# Allegro board test.brd
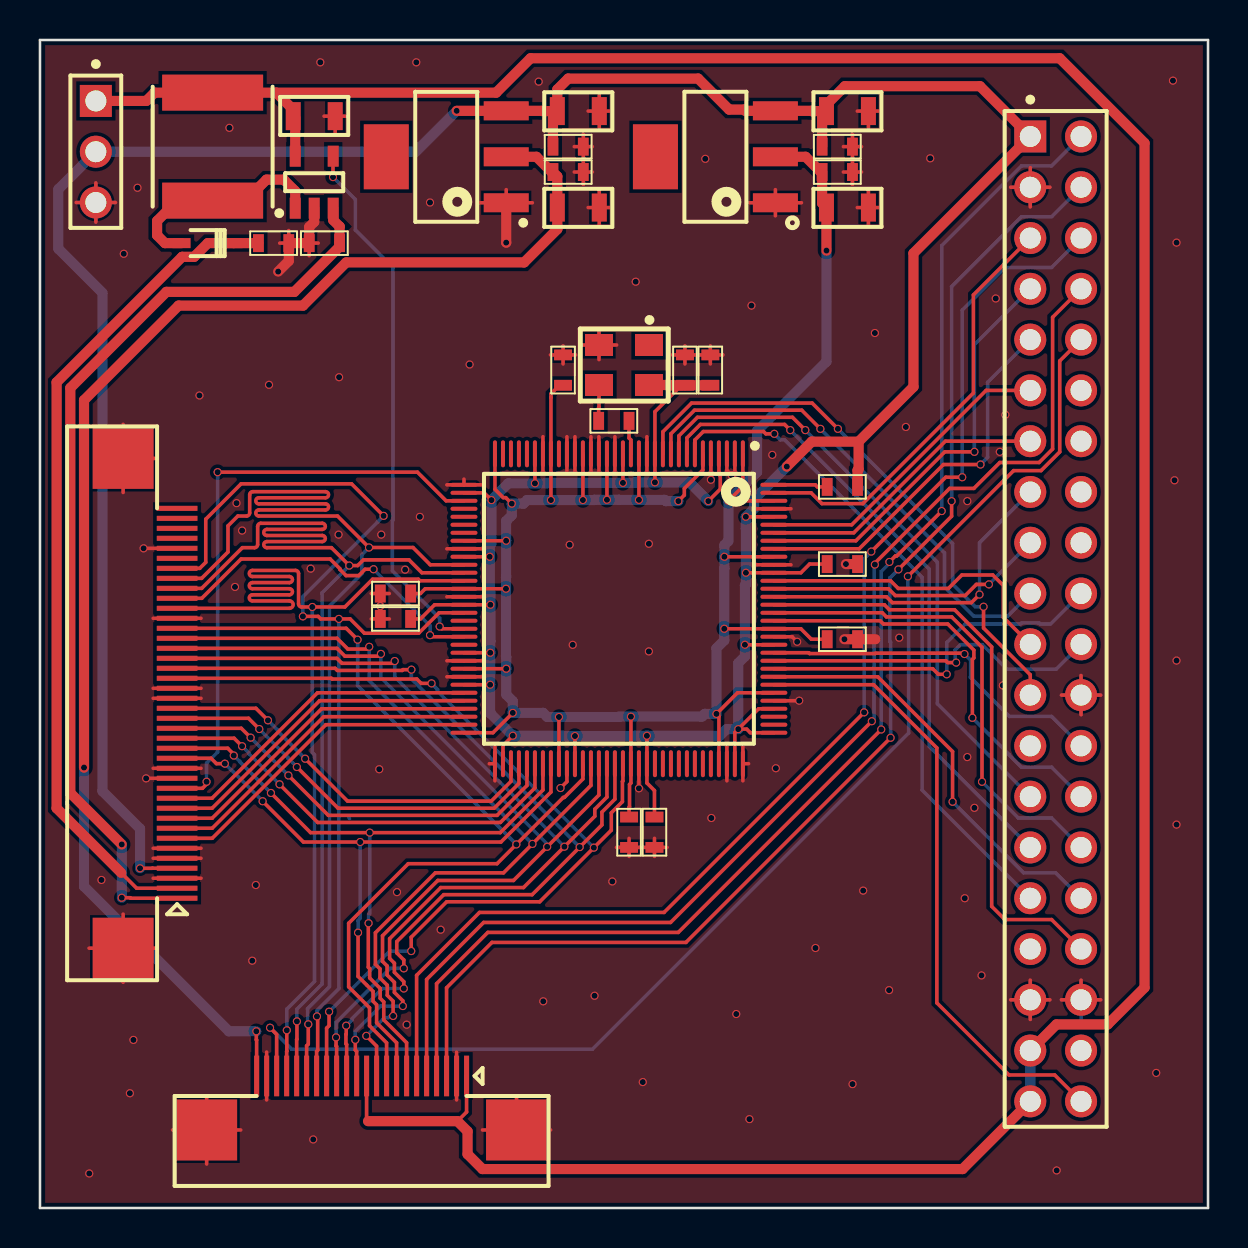
[diagram p0: board, top side]
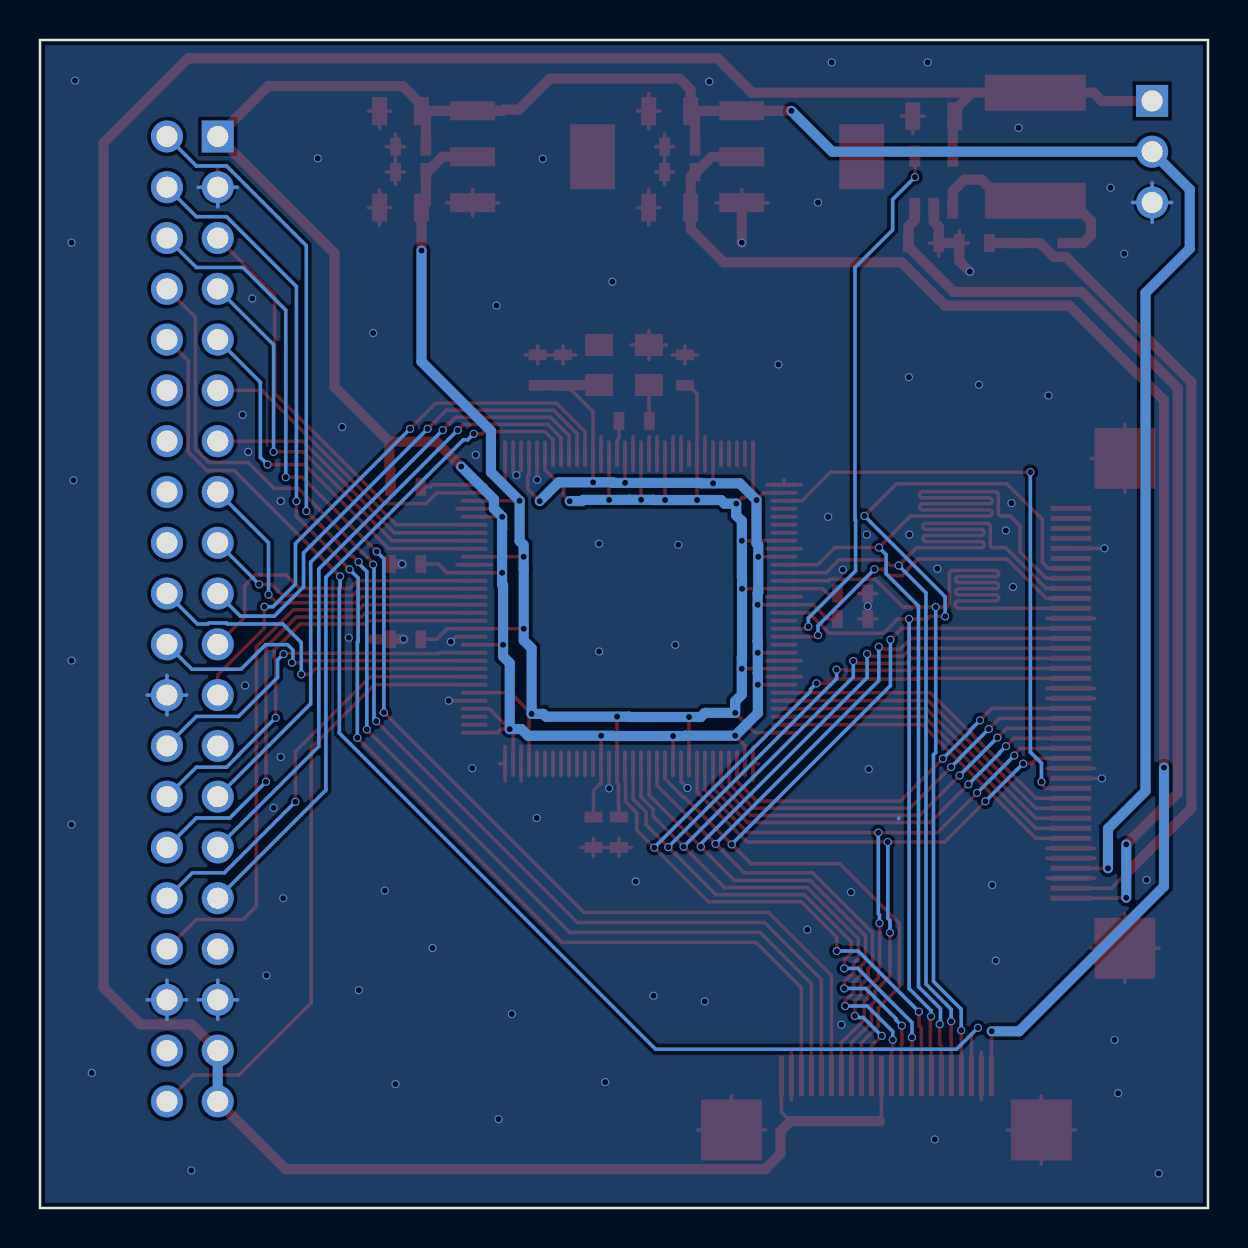
[diagram p1: board, bottom side, seen from below]

Outline 58.42 x 58.42 mm; copper layers: TOP, BOTTOM. Coordinates in mm from the lower left corner of the outline.
Outline path: 0,58.42 0,0 58.42,0 58.42,58.42 0,58.42

## Design rules (mm)
net group POWER: nets 1.2 2.5 3.3 5

## Placement (name value [footprint] x y rotation side)
C1  0.1uF  [0603]  33.53 41.91 90 top
C2  0.1uF  [0603]  26.16 41.91 90 top
C3  10uF  [0805]  26.92 54.86 180 top
C4  0.1uF  [0603]  26.42 53.09 180 top
C5  10uF  [0805]  26.92 50.04 180 top
C6  0.1uF  [0603]  26.42 51.82 180 top
C7  10uF  [0805]  40.39 50.04 180 top
C8  0.1uF  [0603]  39.88 51.82 180 top
C9  10uF  [0805]  40.39 54.86 180 top
C10  0.1uF  [0603]  39.88 53.09 180 top
C11  0.1uF  [0603]  17.78 29.46 180 top
C12  0.1uF  [0603]  17.78 30.73 180 top
C13  0.1uF  [0603]  32.26 41.91 270 top
C14  10uF  [0805]  13.72 54.61 0 top
C15  0.1uF  [0603]  11.68 48.26 0 top
C16  0.1uF  [0603]  40.13 32.21 0 top
C17  0.1uF  [0603]  40.13 28.45 0 top
C18  0.1uF  [0603]  30.73 18.8 270 top
C19  0.1uF  [0603]  29.46 18.8 270 top
D1  1n5819  [SOD323]  8.38 48.26 180 top
F1  -  [FPC-22]  21.34 6.6 180 top
F2  -  [FPC-40]  6.86 15.49 90 top
H1  Header20*2  [H-20-2]  49.53 53.59 270 top
J1  CON3  [H-3]  2.79 55.37 270 top
L1  10uH  [L-6-6-3]  8.64 53.09 90 top
O1  OSC  [OSC-3225]  29.21 42.16 270 top
R1  4.7K  [0603]  40.13 36.07 0 top
R2  33  [0603]  28.7 39.37 0 top
R3  10  [0603]  14.22 48.26 180 top
U1  AS1117-2.5  [AS1117-SOT223]  20.32 52.58 180 top
U2  AS1117-1.2  [AS1117-SOT223]  33.78 52.58 180 top
U3  SSD1963  [SSD1963-LQFP]  28.96 29.97 270 top
U4  CAT4238  [CAT4238-TSOT23]  13.72 51.31 90 top

## Library data of the parts
C1-C19 = CAP NP
D1 = 1n5819
F1 = FPC-22
F2 = FPC-40
H1 = Header20*2
J1 = CON3
L1 = INDUCTOR
O1 = OSC
R1-R3 = R
U1 U2 = AS1117
U3 = SSD1963
U4 = CAT4238

## Footprints (pads in the part's own frame, mm; a bottom-side part is the same pattern mirrored in y, then rotated)
0603
  rect 0.541x0.899 smd: 1(-0.759,0) 2(0.759,0)
0805
  rect 0.749x1.4 smd: 1(-1.049,0) 2(1.049,0)
AS1117-SOT223
  rect 2.25x0.95 smd: 1(-3,2.299) 2(-3,0) 3(-3,-2.299)
  rect 2.25x3.251 smd: 4(3,0)
CAT4238-TSOT23
  rect 1.049x0.551 smd: 1(-1.3,0.95) 2(-1.3,0) 3(-1.3,-0.95) 4(1.3,-0.95) 5(1.3,0.95)
FPC-22
  rect 0.254x2.032 smd: 1(0,0) 2(0.5,0) 3(1.001,0) 4(1.501,0) 5(1.999,0) 6(2.499,0) 7(3,0) 8(3.5,0) 9(4,0) 10(4.501,0) 11(5.001,0) 12(5.499,0) 13(5.999,0) 14(6.5,0) 15(7,0) 16(7.501,0) 17(8.001,0) 18(8.499,0) 19(8.999,0) 20(9.5,0) 21(10,0) 22(10.5,0)
  rect 3.048x3.048 smd: 23(-2.499,2.7) 24(13,2.7)
FPC-40
  rect 0.254x2.032 smd: 1(0,0) 2(0.5,0) 3(1.001,0) 4(1.501,0) 5(1.999,0) 6(2.499,0) 7(3,0) 8(3.5,0) 9(4,0) 10(4.501,0) 11(5.001,0) 12(5.499,0) 13(5.999,0) 14(6.5,0) 15(7,0) 16(7.501,0) 17(8.001,0) 18(8.499,0) 19(8.999,0) 20(9.5,0) 21(10,0) 22(10.5,0) 23(11.001,0) 24(11.501,0) 25(11.999,0) 26(12.499,0) 27(13,0) 28(13.5,0) 29(14,0) 30(14.501,0) 31(15.001,0) 32(15.499,0) 33(15.999,0) 34(16.5,0) 35(17,0) 36(17.501,0) 37(18.001,0) 38(18.499,0) 39(18.999,0) 40(19.5,0)
  rect 3.048x3.048 smd: 41(-2.499,2.7) 42(21.999,2.7)
H-3
  rect 1.6x1.6 hole 1.049: 1(0,0)
  round 1.6 hole 1.049: 2(2.54,0) 3(5.08,0)
H-20-2
  rect 1.6x1.6 hole 1.049: 1(0,0)
  round 1.6 hole 1.049: 2(0,2.54) 3(2.54,0) 4(2.54,2.54) 5(5.08,0) 6(5.08,2.54) 7(7.62,0) 8(7.62,2.54) 9(10.16,0) 10(10.16,2.54) 11(12.7,0) 12(12.7,2.54) 13(15.24,0) 14(15.24,2.54) 15(17.78,0) 16(17.78,2.54) 17(20.32,0) 18(20.32,2.54) 19(22.86,0) 20(22.86,2.54) 21(25.4,0) 22(25.4,2.54) 23(27.94,0) 24(27.94,2.54) 25(30.48,0) 26(30.48,2.54) 27(33.02,0) 28(33.02,2.54) 29(35.56,0) 30(35.56,2.54) 31(38.1,0) 32(38.1,2.54) 33(40.64,0) 34(40.64,2.54) 35(43.18,0) 36(43.18,2.54) 37(45.72,0) 38(45.72,2.54) 39(48.26,0) 40(48.26,2.54)
L-6-6-3
  rect 1.801x5.05 smd: 1(-2.7,0) 2(2.7,0)
OSC-3225
  rect 1.1x1.4 smd: 1(-1.001,1.25) 2(-1.001,-1.25) 3(1.001,-1.25) 4(1.001,1.25)
SOD323
  rect 0.899x0.5 smd: 1(-1.3,0) 2(1.3,0)
SSD1963-LQFP
  oval 1.349x0.201 smd: 1(-7.75,6.2) 2(-7.75,5.799) 3(-7.75,5.4) 4(-7.75,5.001) 5(-7.75,4.6) 6(-7.75,4.201) 7(-7.75,3.8) 8(-7.75,3.401) 9(-7.75,3) 10(-7.75,2.601) 11(-7.75,2.2) 12(-7.75,1.801) 13(-7.75,1.4) 14(-7.75,1.001) 15(-7.75,0.599) 16(-7.75,0.201) 17(-7.75,-0.201) 18(-7.75,-0.599) 19(-7.75,-1.001) 20(-7.75,-1.4) 21(-7.75,-1.801) 22(-7.75,-2.2) 23(-7.75,-2.601) 24(-7.75,-3) 25(-7.75,-3.401) 26(-7.75,-3.8) 27(-7.75,-4.201) 28(-7.75,-4.6) 29(-7.75,-5.001) 30(-7.75,-5.4) 31(-7.75,-5.799) 32(-7.75,-6.2) 65(7.75,-6.2) 66(7.75,-5.799) 67(7.75,-5.4) 68(7.75,-5.001) 69(7.75,-4.6) 70(7.75,-4.201) 71(7.75,-3.8) 72(7.75,-3.401) 73(7.75,-3) 74(7.75,-2.601) 75(7.75,-2.2) 76(7.75,-1.801) 77(7.75,-1.4) 78(7.75,-1.001) 79(7.75,-0.599) 80(7.75,-0.201) 81(7.75,0.201) 82(7.75,0.599) 83(7.75,1.001) 84(7.75,1.4) 85(7.75,1.801) 86(7.75,2.2) 87(7.75,2.601) 88(7.75,3) 89(7.75,3.401) 90(7.75,3.8) 91(7.75,4.201) 92(7.75,4.6) 93(7.75,5.001) 94(7.75,5.4) 95(7.75,5.799) 96(7.75,6.2)
  oval 0.201x1.349 smd: 33(-6.2,-7.75) 34(-5.799,-7.75) 35(-5.4,-7.75) 36(-5.001,-7.75) 37(-4.6,-7.75) 38(-4.201,-7.75) 39(-3.8,-7.75) 40(-3.401,-7.75) 41(-3,-7.75) 42(-2.601,-7.75) 43(-2.2,-7.75) 44(-1.801,-7.75) 45(-1.4,-7.75) 46(-1.001,-7.75) 47(-0.599,-7.75) 48(-0.201,-7.75) 49(0.201,-7.75) 50(0.599,-7.75) 51(1.001,-7.75) 52(1.4,-7.75) 53(1.801,-7.75) 54(2.2,-7.75) 55(2.601,-7.75) 56(3,-7.75) 57(3.401,-7.75) 58(3.8,-7.75) 59(4.201,-7.75) 60(4.6,-7.75) 61(5.001,-7.75) 62(5.4,-7.75) 63(5.799,-7.75) 64(6.2,-7.75) 97(6.2,7.75) 98(5.799,7.75) 99(5.4,7.75) 100(5.001,7.75) 101(4.6,7.75) 102(4.201,7.75) 103(3.8,7.75) 104(3.401,7.75) 105(3,7.75) 106(2.601,7.75) 107(2.2,7.75) 108(1.801,7.75) 109(1.4,7.75) 110(1.001,7.75) 111(0.599,7.75) 112(0.201,7.75) 113(-0.201,7.75) 114(-0.599,7.75) 115(-1.001,7.75) 116(-1.4,7.75) 117(-1.801,7.75) 118(-2.2,7.75) 119(-2.601,7.75) 120(-3,7.75) 121(-3.401,7.75) 122(-3.8,7.75) 123(-4.201,7.75) 124(-4.6,7.75) 125(-5.001,7.75) 126(-5.4,7.75) 127(-5.799,7.75) 128(-6.2,7.75)

## Nets
GND: C1.2 C2.2 C3.1 C4.1 C5.1 C6.1 C7.1 C8.1 C9.1 C10.1 C11.2 C12.2 C13.1 C14.2 C15.2 C16.2 C17.2 C18.2 C19.2 F1.2 F1.21 F1.23 F1.24 F2.3 F2.5 F2.6 F2.13 F2.14 F2.21 F2.22 F2.29 F2.36 F2.41 F2.42 H1.3 H1.24 H1.35 H1.36 J1.3 O1.2(GND) R3.2 U1.1(GND) U2.1(GND) U3.2(VSS_1) U3.3(VSS_2) U3.5(VSS_3) U3.13(VSS_4) U3.17(VSS_5) U3.19(VSSPLL) U3.20(VSS_6) U3.22(XTAL_IN) U3.23(VSS_7) U3.26(VSS_8) U3.33(VSS_9) U3.41(VSS_10) U3.47(VSS_11) U3.55(VSS_12) U3.57(VSS_13) U3.65(VSS_14) U3.74(VSS_15) U3.83(VSS_16) U3.94(VSS_17) U3.96(VSS_18) U3.101(VSS_19) U3.109(VSS_20) U3.118(VSS-21) U3.125(VSS_22) U4.2(GND)
1.2: C2.1 C7.2 C8.2 C12.1 C17.1 C19.1 U2.2(VOUT) U3.1(VDDD_1) U3.6(VDDD_2) U3.14(VDDD_3) U3.18(VDDPLL) U3.21(VDDD_4) U3.25(VDDD_5) U3.32(VDDD_6) U3.40(VDDD_7) U3.46(VDDD_8) U3.56(VDDD_9) U3.64(VDDD_10) U3.73(VDDD_11) U3.82(VDDD_12) U3.93(VDDD_13) U3.102(VDDD_14) U3.110(VDDD_15) U3.119(VDDD_16) U3.126(VDDD_17)
2.5: C5.2 C6.2 F1.22 U1.2(VOUT)
3.3: C1.1 C3.2 C4.2 C9.2 C10.2 C11.1 C13.2 C16.1 C18.1 F2.4 H1.1 J1.2 O1.4(VDD) R1.2 U1.3(VIN) U2.3(VIN) U3.4(VDDIO_1) U3.12(VDDIO_2) U3.16(VDDIO_3) U3.27(VDDLCD_1) U3.34(VDDLCD_2) U3.42(VDDLCD_3) U3.48(VDDLCD_4) U3.54(VDDLCD_5) U3.58(VDDLCD_6) U3.66(VDDLCD_7) U3.75(VDDLCD_8) U3.84(VDDLCD_9) U3.95(VDDIO_4) U3.97(VDDIO_5) U3.100(VDDIO_6) U3.108(VDDIO_7) U3.117(VDDIO_8) U3.124(VDDIO_9)
5: C14.1 F1.1 F1.11 H1.37 H1.39 J1.1 L1.2 U4.5(VIN)
CS: H1.11 U3.123(CS#)
D0: H1.31 U3.7(D0)
D1: H1.29 U3.8(D1)
D2: H1.27 U3.9(D2)
D3: H1.19 U3.10(D3)
D4: H1.23 U3.11(D4)
D5: H1.21 U3.116(D5)
D6: H1.17 U3.115(D6)
D7: H1.15 U3.114(D7)
D8: H1.34 U3.113(D8)
D9: H1.30 U3.112(D9)
D10: H1.28 U3.111(D10)
D11: H1.26 U3.107(D11)
D12: H1.22 U3.106(D12)
D13: H1.20 U3.105(D13)
D14: H1.32 U3.104(D14)
D15: H1.40 U3.103(D15)
DEN: F1.16 F2.34 U3.49(LDEN)
GAMAS0: F2.31 U3.52(GAMAS0)
LCD_RST: H1.5 U3.127(RESET#)
LD0: F1.15 F2.23 U3.81(LDATA0)
LD1: F1.14 F2.24 U3.80(LDATA1)
LD2: F1.13 F2.25 U3.79(LDATA2)
LD3: F1.12 F2.26 U3.78(LDATA3)
LD4: F1.10 F2.27 U3.77(LDATA4)
LD5: F1.9 F2.28 U3.76(LDATA5)
LD6: F1.8 F2.15 U3.72(LDATA6)
LD7: F1.7 F2.16 U3.71(LDATA7)
LD8: F2.17 U3.70(LDATA8)
LD9: F2.18 U3.69(LDATA9)
LD10: F2.19 U3.68(LDATA10)
LD11: F2.20 U3.67(LDATA11)
LD12: F2.7 U3.63(LDATA12)
LD13: F2.8 U3.62(LDATA13)
LD14: F2.9 U3.61(LDATA14)
LD15: F2.10 U3.60(LDATA15)
LD16: F2.11 U3.59(LDATA16)
LD17: F2.12 U3.35(LDATA17)
LED+: C15.1 D1.1 F2.2
LED-: F2.1 R3.1 U4.3(FB)
LFRAME: F1.17 F2.33 U3.43(LFRAME)
LLINE: F1.18 F2.32 U3.44(LLINE)
MISO: F1.5 H1.8
MOSI: F1.6 H1.6
PB6: F1.20 H1.10
PWM: U3.51(PWM) U4.4(S\H\D\N\)
RD: H1.7 U3.121(E(RD#))
RS: H1.13 U3.122(D/C#)
SHIFT: F1.19 F2.30 U3.45(LSHIFT)
SPI_CS: F1.3 H1.4
SPI_SCK: F1.4 H1.2
WR: H1.9 U3.120(R/W#(WR#))
N01093: D1.2 L1.1 U4.1(SW)
N11014: R2.2 U3.15(CLK)
N21532: R1.1 U3.128(CONF)
N24542: O1.3(OUT) R2.1

Pads without a net: F2 35 37 38 39 40; H1 12 14 16 18 25 33 38; O1 1; U1 4; U2 4; U3 24 28 29 30 31 36 37 38 39 50 53 85 86 87 88 89 90 91 92 98 99

## Via types
v1: diameter 0.406, hole 0.305, TOP to BOTTOM, 206 vias

## Routing (per net, layer and track width the routed paths; a pad name or vN(x,y) marks a point on that pad's centre or on a via; arc(x,y) is an arc through that point)
GND: length 181
  TOP w0.178: 20.35,27.37 U3.55 22.06,27.37 ; 11.99,48.26 C15.2 12.44,48.89 ; 29.46,17.58 C19.2 ; C19.2 30.09,18.04 ; C19.2 28.83,18.04 ; C19.2 29.46,18.49 ; 37.56,32.17 U3.118 35.85,32.17 ; U2.1 38.09,50.28 ; U2.1 36.78,49.62 ; U2.1 35.48,50.28 ; U2.1 36.78,50.93 ; 16.57,30.73 C12.2 ; C12.2 v1(17.02,30.1) ; C12.2 17.47,30.73 ; 49.53,50.07 H1.3 ; H1.3 48.55,51.05 ; H1.3 50.51,51.05 ; H1.3 49.53,52.03 ; 34.36,23.08 U3.94 34.36,21.37 ; O1.2 28.84,43.16 ; O1.2 27.96,43.9 ; O1.2 27.08,43.16 ; O1.2 27.96,42.43 ; v1(37.97,25.37) 37.97,25.37 U3.101 ; 33.53,42.22 C1.2 ; C1.2 32.9,42.67 ; C1.2 33.53,43.12 ; C1.2 34.16,42.67 ; U3.74 26.36,21.33 v1(26.04,21.01) ; U3.3 34.36,36.89 v1(34.59,36.65) 34.75,36.81 U3.2 ; C11.2 17.47,29.46 ; C11.2 16.57,29.46 ; C11.2 17.02,30.09 ; 2.79,49.31 J1.3 ; J1.3 1.81,50.29 ; J1.3 2.79,51.27 ; J1.3 3.77,50.29 ; U3.33 21.21,36.45 ; U3.33 22.06,36.17 ; U3.33 20.35,36.17 ; C6.1 27.63,51.82 ; C6.1 27.18,51.19 ; C6.1 26.72,51.82 ; C6.1 27.18,52.45 ; 5.66,17.49 F2.5 8.05,17.49 ; 20.35,32.97 U3.41 22.06,32.97 ; H1.35 50.51,10.41 ; H1.35 48.55,10.41 ; H1.35 49.53,11.39 ; H1.35 49.53,9.43 ; 30.36,38.58 U3.13 30.36,36.87 ; 13.46,47.63 R3.2 13.92,48.26 ; 37.56,34.97 U3.125 35.85,34.97 ; C2.2 26.16,43.12 ; C2.2 26.16,42.22 ; C2.2 26.79,42.67 ; C2.2 25.53,42.67 ; 27.96,36.87 U3.19 27.96,38.58 ; C7.1 41.44,50.92 ; C7.1 41.44,49.16 ; C7.1 40.88,50.04 ; C7.1 41.99,50.04 ; 52.07,24.67 H1.24 ; H1.24 53.05,25.65 ; H1.24 51.09,25.65 ; H1.24 52.07,26.63 ; U3.65 22.76,23.08 ; U3.65 22.47,22.22 ; U3.65 22.76,21.37 ; F1.24 8.34,5.61 ; F1.24 6.63,3.9 ; F1.24 10.04,3.9 ; F1.24 8.34,2.2 ; C5.1 28.53,50.04 ; C5.1 27.97,49.16 ; C5.1 27.42,50.04 ; C5.1 27.97,50.92 ; 27.42,54.86 C3.1 ; C3.1 27.97,53.98 ; C3.1 27.97,55.75 ; C3.1 28.53,54.86 ; U3.109 37.62,28.57 v1(37.87,28.32) ; 26.76,36.87 U3.22 26.76,38.58 ; C9.1 41.99,54.86 ; C9.1 41.44,53.98 ; C9.1 40.88,54.86 ; 26.36,36.87 U3.23 26.36,38.58 ; v1(5.31,21.49) 5.31,21.49 F2.13 ; 27.56,36.87 U3.20 27.56,38.58 ; 26.72,53.09 C4.1 ; C4.1 27.63,53.09 ; C4.1 27.18,52.46 ; C4.1 27.18,53.72 ; 40.19,51.82 C8.1 ; C8.1 41.09,51.82 ; C8.1 40.64,51.19 ; C8.1 40.64,52.45 ; 33.56,36.68 33.55,36.68 ; 33.56,36.68 U3.5 ; 33.56,36.68 v1(33.56,36.42) ; F2.42 4.16,39.2 ; F2.42 5.86,37.49 ; F2.42 4.16,35.79 ; U1.1 24.63,50.28 ; U1.1 23.32,50.93 ; U1.1 22.01,50.28 ; F2.41 4.16,14.7 ; F2.41 5.86,12.99 ; F2.41 2.45,12.99 ; F2.41 4.16,11.29 ; 28.76,36.87 U3.17 28.76,38.58 ; 11.34,7.8 F1.21 11.34,5.41 ; 20.84,5.41 F1.2 20.84,7.8 ; F1.23 25.54,3.9 ; F1.23 23.84,5.61 ; F1.23 22.13,3.9 ; 5.66,16.49 F2.3 8.05,16.49 ; 8.05,25.99 F2.22 5.66,25.99 ; C13.1 32.26,43.12 ; C13.1 32.26,42.22 ; C13.1 31.63,42.67 ; C13.1 32.89,42.67 ; H1.36 53.05,10.41 ; H1.36 51.09,10.41 ; H1.36 52.07,11.39 ; 25.16,36.87 U3.26 25.16,38.58 ; 5.66,29.49 F2.29 8.05,29.49 ; 8.05,25.49 F2.21 5.66,25.49 ; C18.2 30.73,18.49 ; C18.2 30.1,18.04 ; C18.2 30.73,17.58 ; C18.2 31.36,18.04 ; 14.77,53.73 C14.2 ; C14.2 15.32,54.61 ; C14.2 14.21,54.61 ; 22.06,30.57 U3.47 20.35,30.57 ; 8.05,17.99 F2.6 5.66,17.99 ; 40.19,53.09 C10.1 ; C10.1 40.64,53.72 ; C10.1 40.64,52.46 ; C10.1 41.09,53.09 ; 35.16,21.37 U3.96 ; U3.96 35.16,23.08 ; U3.96 35.44,22.22 ; 22.06,26.57 U3.57 20.35,26.57 ; 8.05,21.99 F2.14 5.66,21.99 ; F2.36 v1(5.18,32.99) ; U3.83 v1(29.96,20.99)
  TOP w0.508: v1(11.91,46.84) 12.44,47.37 C15.2 R3.2 13.46,49.07 13.72,49.32 U4.2 ; v1(40.23,28.45) C17.2 41.78,28.45 ; C16.2 v1(40.31,32.21) ; U1.1 23.32,48.29 v1(23.32,48.29)
  BOTTOM w0.178: H1.36 53.05,10.41 ; H1.36 51.09,10.41 ; H1.36 52.07,11.39 ; H1.36 52.07,9.43 ; 51.09,25.65 H1.24 ; H1.24 52.07,24.67 ; H1.24 53.05,25.65 ; H1.24 52.07,26.63 ; 48.55,10.41 H1.35 ; H1.35 50.51,10.41 ; H1.35 49.53,11.39 ; H1.35 49.53,9.43 ; J1.3 3.77,50.29 ; J1.3 2.79,49.31 ; J1.3 2.79,51.27 ; J1.3 1.81,50.29 ; 48.55,51.05 H1.3 ; H1.3 49.53,50.07 ; H1.3 50.51,51.05 ; 15.48,19.47 15.45,19.5
  vias: v1(2.46,1.73) v1(3.07,16.41) v1(4.19,47.73) v1(4.5,5.74) v1(4.67,8.41) v1(4.88,51.03) v1(7.98,40.64) v1(9.47,54.03) v1(9.83,35.26) v1(9.75,31.06) v1(10.11,33.88) v1(10.62,12.37) v1(10.79,16.15) v1(11.46,41.17) v1(13.54,31.98) v1(13.67,3.43) v1(14.02,57.3) v1(14.94,33.68) v1(14.96,41.55) v1(16.97,21.95) v1(17.07,33.68) v1(17.86,15.8) v1(18.26,31.93) v1(18.34,9.17) v1(18.82,57.3) v1(19,34.57) v1(19.51,50.29) v1(20.04,13.92) v1(21.49,42.19) v1(24.94,56.34) v1(25.17,10.34) v1(26.49,33.17) v1(26.64,28.17) v1(27.74,10.62) v1(28.63,16.33) v1(29.79,46.33) v1(30.15,6.3) v1(30.45,33.22) v1(30.45,27.84) v1(33.27,52.48) v1(33.58,19.51) v1(34.82,9.7) v1(35.48,4.45) v1(35.59,45.14) v1(36.63,37.67) v1(36.8,22) v1(38.79,13) v1(40.64,6.2) v1(41.17,15.88) v1(41.76,43.76) v1(42.47,10.9) v1(42.98,28.52) v1(43.31,39.07) v1(44.53,52.5) v1(46.25,15.49) v1(46.38,35.36) v1(46.38,22.56) v1(46.74,20.02) v1(47.09,11.63) v1(47.8,45.49) v1(48.01,37.82) v1(48.16,26.14) v1(48.29,39.67) v1(50.85,1.88) v1(55.83,6.76) v1(56.67,56.39) v1(56.74,36.4) v1(56.85,48.29) v1(56.85,27.38) v1(56.85,19.18)
1.2: length 118.4
  TOP w0.178: v1(23.65,24.77) 22.65,23.77 U3.64 ; U3.18 v1(28.36,35.42) ; v1(31.93,35.36) 32.23,35.66 32.23,35.99 33.16,36.92 U3.6 ; U3.21 v1(27.16,35.41) ; v1(29.56,24.58) U3.82 29.56,21.25 29.49,21.19 29.49,20.07 29.46,20.05 C19.1 ; U3.119 v1(34.23,32.57) ; U3.102 34.89,25.77 v1(33.83,24.71) 33.96,24.59 U3.93 ; v1(34.22,28.97) U3.110 38.06,28.97 38.58,28.45 C17.1 ; U3.56 v1(23.32,26.97) ; v1(25.55,35.41) U3.25 25.55,40.54 25.56,40.55 25.56,40.72 25.98,41.15 C2.1 ; U3.73 v1(25.96,24.56) ; U3.126 v1(34.43,35.37) 35.16,36.1 U3.1 ; U3.40 v1(23.31,33.37) ; U3.32 22.76,35.94 23.17,35.53 23.3,35.53 v1(23.6,35.23) ; C12.1 19.03,30.73 19.27,30.97 U3.46 v1(23.31,30.97) ; U3.14 v1(29.96,35.42)
  TOP w0.508: v1(39.34,47.89) C7.2 39.12,50.26 C8.2 39.06,51.82 38.29,52.58 U2.2
  BOTTOM w0.508: v1(39.34,47.89) 39.34,42.33 35.86,38.86 35.86,36.8 v1(34.43,35.37) 34.43,33.36 34.23,33.16 v1(34.23,32.57) 34.23,31.99 34.22,31.98 v1(34.22,28.97) 34.22,28.39 33.83,28 v1(33.83,24.71) 33.25,24.71 33.11,24.58 v1(29.56,24.58) 28.97,24.58 28.95,24.56 v1(25.96,24.56) 25.37,24.56 25.17,24.77 v1(23.65,24.77) 23.65,25.35 23.32,25.68 v1(23.32,26.97) 23.32,27.56 23.31,27.57 v1(23.31,30.97) 23.31,31.56 23.31,31.56 v1(23.31,33.37) 23.31,34.36 23.6,34.65 v1(23.6,35.23) 24.18,35.23 24.36,35.41 v1(25.55,35.41) v1(27.16,35.41) 27.74,35.41 27.75,35.42 v1(28.36,35.42) 28.94,35.42 28.95,35.42 v1(29.96,35.42) 31.25,35.42 31.31,35.36 v1(31.93,35.36)
2.5: length 71
  TOP w0.178: F1.22 10.84,8.4 10.82,8.42 v1(10.82,8.84)
  TOP w0.508: U1.2 24.83,52.58 25.59,51.82 C6.2 25.87,51.6 C5.2 25.87,48.96 24.21,47.29 15.32,47.29 13.16,45.14 6.93,45.14 2.2,40.4 v1(2.2,22.03)
  BOTTOM w0.508: v1(2.2,22.03) 2.2,16.09 9.45,8.84 v1(10.82,8.84)
3.3: length 213.8
  TOP w0.178: v1(30.76,36.29) U3.12 30.76,39.83 32.08,41.15 ; v1(34.92,23.95) 34.75,23.78 U3.95 ; v1(34.92,23.95) 35.35,23.95 35.53,23.77 U3.97 ; v1(34.92,23.95) 35.94,24.97 U3.100 ; U3.66 23.16,23.13 v1(23.65,23.62) ; U3.54 v1(22.52,27.77) ; U3.124 v1(35.3,34.57) ; U3.42 v1(22.49,32.57) ; v1(30.36,23.62) U3.84 30.36,21.26 30.73,20.88 C18.1 ; v1(22.53,30.17) U3.48 19.74,30.17 19.03,29.46 C11.1 ; U3.58 v1(22.51,26.17) ; U3.4 33.96,36.69 34.03,36.62 34.03,35.96 v1(33.43,35.36) ; U3.16 v1(29.16,36.27) ; v1(35.31,31.77) U3.117 38.06,31.77 38.49,32.21 C16.1 ; v1(5,16.99) 5.62,16.99 5.62,17 F2.4 ; U3.34 22.22,35.77 v1(22.58,35.41) ; U3.27 v1(24.75,36.25) ; U3.75 v1(26.76,23.61) ; U3.108 v1(35.26,28.17)
  TOP w0.508: 40.94,38.33 43.69,41.07 43.69,47.75 H1.1 47.02,56.11 40.26,56.11 39.34,55.19 C9.2 ; 40.94,38.33 40.94,36.95 40.89,36.9 R1.2 ; 40.94,38.33 38.6,38.33 v1(37.35,37.08) ; C9.2 39.12,54.65 C10.2 ; C9.2 38.58,54.86 38.57,54.88 U2.3 35.28,54.88 35.21,54.94 34.47,54.94 32.92,56.49 26.42,56.49 25.87,55.95 C3.2 ; C3.2 25.12,54.86 25.11,54.88 U1.3 v1(20.84,54.88) ; C3.2 25.66,54.65 C4.2 ; O1.4 31.54,41.16 31.55,41.15 C13.2 C1.1
  BOTTOM w0.508: v1(20.84,54.88) 18.8,52.83 J1.2 0.91,50.95 0.91,47.98 3.12,45.77 3.12,20.85 5,18.97 v1(5,16.99) ; v1(33.43,35.36) 32.49,36.29 v1(30.76,36.29) 29.77,36.29 29.74,36.27 v1(29.16,36.27) 25.36,36.27 25.34,36.25 v1(24.75,36.25) 23.42,36.25 v1(22.58,35.41) 22.58,33.24 22.49,33.16 v1(22.49,32.57) 22.49,30.79 22.53,30.76 v1(22.53,30.17) 22.53,28.36 22.52,28.36 v1(22.52,27.77) 22.52,26.76 22.51,26.76 v1(22.51,26.17) 22.51,24.75 v1(23.65,23.62) 26.16,23.62 26.17,23.61 v1(26.76,23.61) 29.76,23.61 29.77,23.62 v1(30.36,23.62) 34.01,23.62 34.34,23.95 v1(34.92,23.95) 34.92,27.25 35.26,27.59 v1(35.26,28.17) 35.26,31.14 35.31,31.19 v1(35.31,31.77) 35.31,33.98 35.3,33.99 v1(35.3,34.57) 35.72,34.99 35.72,35.45 v1(37.35,37.08)
5: length 151.4
  TOP w0.178: 20.88,4.34 21.34,4.8 F1.1 ; 16.41,4.34 16.33,4.42 F1.11
  TOP w0.508: 11.82,55.79 12.67,54.94 C14.1 12.77,54.51 U4.5 ; 11.82,55.79 L1.2 5.73,55.79 5.32,55.37 J1.1 ; 11.82,55.79 22.82,55.79 24.54,57.51 51,57.51 55.24,53.26 55.24,11.02 53.4,9.18 50.84,9.18 H1.37 ; H1.39 46.14,1.95 22.13,1.95 21.39,2.69 21.39,3.84 20.88,4.34 16.41,4.34
  BOTTOM w0.508: H1.37 H1.39
CS: length 15.6
  TOP w0.178: H1.11 47.32,40.89 40.6,34.17 U3.123
D0: length 33.5
  TOP w0.178: U3.7 32.76,38.41 33.18,38.84 36.19,38.84 36.3,38.72 v1(36.73,38.72)
  BOTTOM w0.178: H1.31 44.12,20.9 44.12,31.55 37.24,38.42 37.03,38.42 v1(36.73,38.72)
D1: length 32.2
  TOP w0.178: v1(37.53,38.91) 37.24,39.19 33.03,39.19 32.36,38.52 U3.8
  BOTTOM w0.178: H1.29 44.48,23.09 44.48,31.96 v1(37.53,38.91)
D2: length 30.9
  TOP w0.178: U3.9 31.96,38.62 32.88,39.55 37.64,39.55 v1(38.28,38.91)
  BOTTOM w0.178: H1.27 44.88,25.22 44.88,32.3 v1(38.28,38.91)
D3: length 25.2
  TOP w0.178: v1(39.03,38.97) 38.1,39.9 32.74,39.9 31.56,38.72 U3.10
  BOTTOM w0.178: H1.19 48.4,29.6 46.7,29.6 45.24,31.06 45.24,32.77 v1(39.03,38.97)
D4: length 28.5
  TOP w0.178: v1(47.19,30.07) 47.19,29.01 49.53,26.67 H1.23 ; U3.11 31.16,38.83 32.59,40.26 38.62,40.26 v1(39.91,38.97)
  BOTTOM w0.178: v1(39.91,38.97) 45.64,33.24 45.64,31.2 46.77,30.07 v1(47.19,30.07)
D5: length 15.6
  TOP w0.178: U3.116 42.54,31.37 42.93,30.99 45.44,30.99 46.11,31.66 47.66,31.66 48.18,31.13 48.18,29.54 H1.21
D6: length 14.1
  TOP w0.178: U3.115 42.44,30.97 42.78,30.63 46.27,30.63 46.83,31.19 v1(47.46,31.19)
  BOTTOM w0.178: v1(47.46,31.19) 47.76,31.49 47.76,31.5 H1.17
D7: length 16.8
  TOP w0.178: U3.114 42.34,30.57 42.63,30.28 46.58,30.28 v1(46.99,30.68)
  BOTTOM w0.178: H1.15 46.99,33.27 v1(46.99,30.68)
D8: length 30.1
  TOP w0.178: H1.34 50.6,14.43 48.26,14.43 47.6,15.09 47.6,28.07 45.75,29.92 42.48,29.92 42.23,30.17 U3.113
D9: length 24.2
  TOP w0.178: U3.112 42.13,29.77 42.33,29.57 45.6,29.57 47.12,28.05 v1(47.12,21.32)
  BOTTOM w0.178: v1(47.12,21.32) 48.93,19.51 50.6,19.51 H1.30
D10: length 21.1
  TOP w0.178: U3.111 42.02,29.37 42.19,29.21 45.4,29.21 46.71,27.9 46.71,27.51 46.63,27.44 v1(46.63,24.52)
  BOTTOM w0.178: v1(46.63,24.52) 48.46,22.69 48.46,22.67 49.09,22.05 50.6,22.05 H1.28
D11: length 17.8
  TOP w0.178: U3.107 38.45,27.77 38.49,27.73 41.77,27.73 41.79,27.75 46.2,27.75 v1(46.24,27.71)
  BOTTOM w0.178: v1(46.24,27.71) 46.54,27.41 46.54,26.54 48.49,24.59 50.6,24.59 H1.26
D12: length 17.2
  TOP w0.178: U3.106 45.31,27.37 45.4,27.28 v1(45.82,27.28)
  BOTTOM w0.178: v1(45.82,27.28) 45.77,27.33 45.77,27.9 46.04,28.18 47.13,28.18 48.36,26.95 50.83,26.95 H1.22
D13: length 18.1
  TOP w0.178: v1(45.35,26.7) 44.93,26.7 44.65,26.97 U3.105
  BOTTOM w0.178: H1.20 50.55,29.21 50.02,29.21 49.97,29.26 49.09,29.26 49.04,29.21 46.28,29.21 45.35,28.28 v1(45.35,26.7)
D14: length 21.4
  TOP w0.178: U3.104 41.9,26.57 45.64,22.83 v1(45.64,20.32)
  BOTTOM w0.178: H1.32 50.8,16.76 49.2,16.76 v1(45.64,20.32)
D15: length 31.5
  TOP w0.178: U3.103 41.7,26.17 44.86,23.01 44.86,10.26 48.46,6.65 50.75,6.65 H1.40
DEN: length 52.9
  TOP w0.178: v1(17.19,34.62) 15.58,36.22 10.06,36.22 8.29,34.45 8.29,32.29 7.99,31.99 F2.34 ; U3.49 19.96,29.77 18.94,28.75 16.23,28.75 15.51,29.46 v1(14.95,29.46) 14.04,29.46 13.91,29.59 v1(13.15,29.59) ; F1.16 13.84,7.84 13.89,7.89 13.89,9.55 v1(13.85,9.58)
  BOTTOM w0.178: v1(13.15,29.59) 13.15,30.58 16.89,34.31 16.89,34.32 v1(17.19,34.62) ; v1(13.85,9.58) 13.85,9.88 14.95,10.98 v1(14.95,29.46)
GAMAS0: length 17.3
  TOP w0.178: F2.31 8.09,30.5 10.06,32.46 14.51,32.46 15,31.97 15,31.94 15.31,31.63 15.94,31.63 16.26,31.95 v1(16.68,31.95) ; U3.52 19.59,28.57 v1(19.51,28.65)
  BOTTOM w0.178: v1(16.68,31.95) 19.51,29.12 v1(19.51,28.65)
LCD_RST: length 21.4
  TOP w0.178: H1.5 46.69,45.67 46.69,40.76 41.15,35.23 39.11,35.23 38.57,35.77 U3.127
LD0: length 49.5
  TOP w0.178: F2.23 14.57,26.49 14.61,26.46 18.85,26.46 19.06,26.24 v1(19.58,26.24) ; U3.81 29.16,21.36 29.13,21.33 29.13,20.32 28.57,19.77 28.57,18.9 v1(27.7,18.02) 24.99,15.32 20.34,15.32 18.57,13.54 v1(18.57,12.85) ; v1(14.46,9.82) 14.46,9.12 14.34,9 F1.15
  BOTTOM w0.178: v1(18.57,12.85) 17.49,12.85 v1(14.46,9.82) ; v1(27.7,18.02) 19.88,25.84 19.88,25.94 v1(19.58,26.24)
LD1: length 48.8
  TOP w0.178: F2.24 14.76,27 14.87,26.89 18.12,26.89 18.16,26.93 v1(18.58,26.93) ; F1.14 14.84,8.08 14.81,8.11 v1(14.81,8.53) ; v1(18.2,11.99) 18.2,12.41 17.84,12.76 17.84,13.32 20.19,15.67 24.62,15.67 v1(27,18.05) 28.11,19.16 28.11,19.8 28.76,20.45 U3.80
  BOTTOM w0.178: v1(18.58,26.93) 18.58,26.47 v1(27,18.05) ; v1(18.2,11.99) 17.52,11.99 14.81,9.28 v1(14.81,8.53)
LD2: length 48.5
  TOP w0.178: U3.79 28.36,20.55 27.75,19.95 27.75,19.59 v1(26.23,18.07) 24.18,16.03 20.05,16.03 17.49,13.47 17.49,12.48 17.73,12.25 17.73,11.79 18.2,11.32 v1(18.2,10.98) ; v1(15.32,9.12) 15.32,8.7 15.3,8.68 15.3,8.22 15.34,8.18 F1.13 ; F2.25 14.85,27.49 15.1,27.24 17.63,27.24 v1(17.74,27.36)
  BOTTOM w0.178: v1(17.74,27.36) 17.74,26.56 v1(26.23,18.07) ; v1(18.2,10.98) 17.12,10.98 15.62,9.48 15.62,9.42 v1(15.32,9.12)
LD3: length 47.9
  TOP w0.178: F1.12 15.84,7.84 15.77,7.9 v1(15.77,8.41) ; v1(17.05,27.71) 16.94,27.6 15.25,27.6 14.86,27.99 F2.26 ; U3.78 27.96,20.66 v1(25.37,18.07) 23.68,16.38 19.9,16.38 17.13,13.62 17.13,12.34 17.36,12.11 17.36,11.65 17.73,11.29 17.73,10.78 18.15,10.36 v1(18.15,10.1)
  BOTTOM w0.178: v1(25.37,18.07) 25.37,18.21 17.05,26.53 v1(17.05,27.71) ; v1(15.77,8.41) 15.77,8.83 17.04,10.1 v1(18.15,10.1)
LD4: length 46.5
  TOP w0.178: F1.10 16.84,8.1 v1(16.32,8.61) ; v1(16.47,28.07) 16.35,27.96 15.4,27.96 14.86,28.49 F2.27 ; U3.77 27.56,21.14 v1(24.63,18.21) 23.18,16.76 19.77,16.76 16.78,13.77 16.78,12.19 17.01,11.96 17.01,11.51 17.37,11.14 17.37,10.64 17.66,10.34 v1(17.66,9.61)
  BOTTOM w0.178: v1(16.47,28.07) 16.47,26.38 v1(24.63,18.21) ; v1(16.32,8.61) 17.24,9.53 17.44,9.53 17.53,9.61 v1(17.66,9.61)
LD5: length 46.7
  TOP w0.178: F1.9 17.34,8.26 16.48,9.12 16.48,10.02 16.3,10.2 15.44,11.06 15.44,14.24 18.42,17.22 22.86,17.22 v1(23.83,18.19) 26.17,20.54 26.23,20.54 27.16,21.46 U3.76 ; F2.28 15.32,28.99 v1(15.89,28.43)
  BOTTOM w0.178: v1(15.89,28.43) 15.89,26.13 v1(23.83,18.19)
LD6: length 35.4
  TOP w0.178: U3.72 25.55,20.81 23.06,18.31 v1(16.01,18.31) 13.17,18.31 v1(11.14,20.35) ; F1.8 17.84,8.27 16.84,9.26 16.84,10.16 16.66,10.34 16.66,10.83 16.34,11.15 15.91,11.58 v1(15.91,13.77) ; v1(9.25,22.23) 8.82,22.23 8.55,22.49 F2.15
  BOTTOM w0.178: v1(16.01,18.31) 16.01,14.49 15.91,14.38 v1(15.91,13.77) ; v1(11.14,20.35) 9.56,21.93 9.55,21.93 v1(9.25,22.23)
LD7: length 35.3
  TOP w0.178: F2.16 9.39,22.99 9.69,22.69 v1(9.69,22.63) ; v1(16.43,14.24) 16.42,14.23 16.42,12.04 16.49,11.97 16.49,11.51 17,11 17.02,10.98 17.02,10.49 17.19,10.31 17.19,9.41 18.34,8.27 F1.7 ; v1(11.55,20.76) 13.53,18.78 v1(16.49,18.78) 23.02,18.78 25.16,20.91 U3.71
  BOTTOM w0.178: v1(11.55,20.76) 9.99,22.32 9.99,22.33 v1(9.69,22.63) ; v1(16.49,18.78) 16.49,14.72 16.43,14.67 v1(16.43,14.24)
LD8: length 21.6
  TOP w0.178: v1(11.98,21.19) 13.89,19.28 23.03,19.28 24.75,21.01 U3.70 ; 6.86,23.5 9.71,23.5 v1(10.11,23.1)
  BOTTOM w0.178: v1(10.11,23.1) 10.44,22.76 10.44,22.73 v1(11.98,21.19)
LD9: length 21
  TOP w0.178: v1(12.43,21.64) 14.42,19.64 22.86,19.64 24.36,21.13 U3.69 ; F2.18 10.07,23.99 v1(10.54,23.53)
  BOTTOM w0.178: v1(12.43,21.64) v1(10.54,23.53)
LD10: length 20.5
  TOP w0.178: v1(12.85,22.06) 14.91,19.99 22.72,19.99 23.95,21.23 U3.68 ; v1(10.97,23.96) 10.43,24.49 F2.19
  BOTTOM w0.178: v1(12.85,22.06) 12.4,22.51 12.4,22.53 v1(10.97,23.96)
LD11: length 19.9
  TOP w0.178: F2.20 10.8,24.99 v1(11.4,24.39) ; U3.67 23.56,21.34 22.57,20.35 15.38,20.35 v1(13.26,22.47)
  BOTTOM w0.178: v1(13.26,22.47) 11.88,23.85 11.88,23.91 v1(11.4,24.39)
LD12: length 16.7
  TOP w0.178: F2.7 8.62,18.49 14.3,24.17 U3.63
LD13: length 16.7
  TOP w0.178: F2.8 8.61,18.99 14.19,24.57 U3.62
LD14: length 16.6
  TOP w0.178: F2.9 8.61,19.49 14.09,24.97 U3.61
LD15: length 16.6
  TOP w0.178: U3.60 13.99,25.37 8.61,19.99 F2.10
LD16: length 16.5
  TOP w0.178: F2.11 8.61,20.5 13.88,25.77 U3.59
LD17: length 30.3
  TOP w0.178: v1(8.88,36.8) 18.88,36.8 20.31,35.37 U3.35 ; F2.12 8.13,20.99 8.33,21.2 v1(8.33,21.32)
  BOTTOM w0.178: v1(8.88,36.8) 8.88,22.8 8.33,22.25 v1(8.33,21.32)
LED+: length 42
  TOP w0.178: F2.2 4.83,15.99 4.06,16.76
  TOP w0.508: C15.1 D1.1 8.39,48.26 7.71,47.57 7.11,47.57 0.83,41.3 0.83,20 4.06,16.76
LED-: length 47.8
  TOP w0.178: F2.1 4.54,15.49 4.51,15.52 v1(4.09,15.52)
  TOP w0.508: v1(4.09,18.19) 1.52,20.76 1.52,41.01 6.32,45.82 12.72,45.82 14.98,48.08 R3.1 14.98,49.09 14.99,49.09 14.67,49.41 U4.3
  BOTTOM w0.508: v1(4.09,18.19) v1(4.09,15.52)
LFRAME: length 61.5
  TOP w0.178: U3.43 19.52,32.17 18.66,33.04 v1(16.46,33.04) 14.88,34.61 10.94,34.61 arc(10.79,34.76) 10.94,34.91 14.28,34.91 arc(14.43,35.07) 14.28,35.22 10.94,35.22 arc(10.79,35.37) 10.94,35.52 14.28,35.52 arc(14.43,35.68) 14.28,35.83 10.64,35.83 arc(10.53,35.78) 10.49,35.68 10.49,34.76 arc(10.44,34.65) 10.34,34.61 9.9,34.61 9.4,34.12 9.4,32.81 8.08,31.49 F2.33 ; 13.34,6.6 13.34,8.11 13.42,8.2 v1(13.42,9.19)
  BOTTOM w0.178: v1(16.46,33.04) 16.1,32.68 16.1,31.72 14.48,30.11 14.48,11.07 13.38,9.97 13.38,9.23 v1(13.42,9.19)
LLINE: length 56.7
  TOP w0.178: F2.32 8.09,30.99 10.12,33.03 10.73,33.03 arc(10.84,33.07) 10.89,33.18 10.89,34.09 arc(10.93,34.2) 11.04,34.25 14.12,34.25 arc(14.27,34.09) 14.12,33.94 11.34,33.94 arc(11.19,33.79) 11.34,33.64 14.12,33.64 arc(14.27,33.48) 14.12,33.33 11.34,33.33 arc(11.19,33.18) 11.34,33.03 14.58,33.03 v1(15.47,32.13) 15.89,32.13 16.18,32.42 18.46,32.42 19.1,31.77 U3.44 ; F1.18 12.84,8.43 12.85,8.44 v1(12.85,9.33)
  BOTTOM w0.178: v1(12.85,9.33) 12.85,9.94 14.11,11.2 14.11,30.77 v1(15.47,32.13)
MISO: length 60.3
  TOP w0.178: F1.5 19.34,11.43 22.19,14.28 31.54,14.28 v1(41.61,24.35) ; v1(41.76,32.18) 41.76,32.25 45.5,35.99 46.71,35.99 48.01,37.29 49.97,37.29 50.65,37.96 50.65,44.55 H1.8
  BOTTOM w0.178: v1(41.76,32.18) 41.71,32.14 41.71,24.46 v1(41.61,24.35)
MOSI: length 63.1
  TOP w0.178: F1.6 18.84,11.64 21.98,14.78 31.21,14.78 v1(41.22,24.79) ; v1(41.58,32.83) 45.3,36.55 v1(46.13,36.55)
  BOTTOM w0.178: v1(46.13,36.55) 46.13,44.91 48.26,47.04 50.6,47.04 H1.6 ; 41.36,24.76 41.25,24.76 v1(41.22,24.79) 41.22,32.47 v1(41.58,32.83)
PB6: length 65.6
  TOP w0.178: F1.20 11.84,8.69 v1(11.51,9.02) ; H1.10 51,42.37 51,37.82 50.07,36.88 48.7,36.88 v1(43.41,31.59)
  BOTTOM w0.178: v1(43.41,31.59) 43.41,31.05 43.45,31.01 43.45,23.76 27.63,7.94 12.58,7.94 v1(11.51,9.02)
PWM: length 27
  TOP w0.178: U4.4 14.66,52.6 v1(14.66,51.56) ; v1(19.99,29.08) 20.1,28.97 U3.51
  BOTTOM w0.178: v1(19.99,29.08) 19.99,29.5 17.63,31.87 17.63,34.39 17.66,34.42 17.66,47.04 15.77,48.92 15.77,50.44 v1(14.66,51.56)
RD: length 21.2
  TOP w0.178: v1(46.74,37.82) 45.25,37.82 40.81,33.37 U3.121
  BOTTOM w0.178: H1.7 46.74,43.18 v1(46.74,37.82)
RS: length 14.7
  TOP w0.178: U3.122 40.7,33.77 45.28,38.35 H1.13
SHIFT: length 54.9
  TOP w0.178: U3.45 19,31.37 18.92,31.45 16.64,31.45 15.25,30.06 v1(13.62,30.06) 13.09,30.06 arc(12.98,30.11) 12.93,30.21 12.93,31.74 arc(12.89,31.85) 12.78,31.89 10.62,31.89 arc(10.47,31.74) 10.62,31.58 12.48,31.58 arc(12.63,31.43) 12.48,31.28 10.62,31.28 arc(10.47,31.13) 10.62,30.98 12.48,30.98 arc(12.63,30.82) 12.48,30.67 10.62,30.67 arc(10.47,30.52) 10.62,30.37 12.48,30.37 arc(12.66,30.18) 12.48,29.99 F2.30 ; v1(12.34,8.89) 12.34,7.85 12.34,7.84 F1.19
  BOTTOM w0.178: v1(13.62,30.06) 13.62,22.78 13.73,22.67 13.73,11.33 12.34,9.94 v1(12.34,8.89)
SPI_CS: length 64.2
  TOP w0.178: v1(42.55,23.52) 32.31,13.28 22.61,13.28 20.34,11.01 F1.3 ; v1(42.94,31.94) 45.6,34.6 v1(45.6,35.35)
  BOTTOM w0.178: v1(42.94,31.94) 42.51,31.51 42.51,28.33 42.55,28.29 v1(42.55,23.52) ; H1.4 50.6,49.58 49.09,49.58 45.6,46.09 v1(45.6,35.35)
SPI_SCK: length 66.8
  TOP w0.178: v1(42.48,32.31) 42.78,32.61 42.85,32.61 v1(45.1,34.86) ; F1.4 19.83,11.22 22.4,13.78 31.93,13.78 v1(42.08,23.93)
  BOTTOM w0.178: v1(42.08,23.93) 42.08,31.83 42.48,32.24 v1(42.48,32.31) ; v1(45.1,34.86) 45.1,48.13 49.09,52.12 50.6,52.12 H1.2
WR: length 19.4
  TOP w0.178: U3.120 40.97,32.97 45.19,37.19 v1(47.04,37.19)
  BOTTOM w0.178: v1(47.04,37.19) 47.4,37.54 47.4,41.3 H1.9
N01093: length 11
  TOP w0.508: U4.1 12.77,50.86 12.19,51.44 11.33,51.44 10.28,50.39 L1.1 6.87,50.39 5.86,49.37 5.86,48.65 6.25,48.26 D1.2
N11014: length 1.7
  TOP w0.178: U3.15 29.56,38.42 29.46,38.51 R2.2
N21532: length 2.7
  TOP w0.178: R1.1 38.88,36.07 38.78,36.17 U3.128
N24542: length 1.8
  TOP w0.178: R2.1 27.94,40.04 27.96,40.06 O1.3

## Copper pours and planes (outline as drawn; the poured copper is in the pictures)
GND on TOP: 0.26,0.26 0.26,58.16 58.16,58.16 58.16,0.26 ; 1 cut-out
GND on BOTTOM: 0.26,0.26 0.26,58.16 58.16,58.16 58.16,0.26 ; 5 cut-outs

## Text on the board
PLACE_BOUND_TOP: FIGURE | SIZE | 12.0 | 41.3 | DRILL CHART: TOP to BOTTOM | ALL UNITS ARE IN MILS | PLATED | QTY | 206 | 43
